# Altium PCB PCB1.PcbDoc
Units mm, origin at the board's own origin, x right, y up, seen from the top; angles counter-clockwise.
Board outline 150 x 150 mm, 2 copper layers (Top Layer, Bottom Layer); 47 components, 43 nets, 165 pads, 0 vias.
Unrouted connection lines stored in the file: 120.
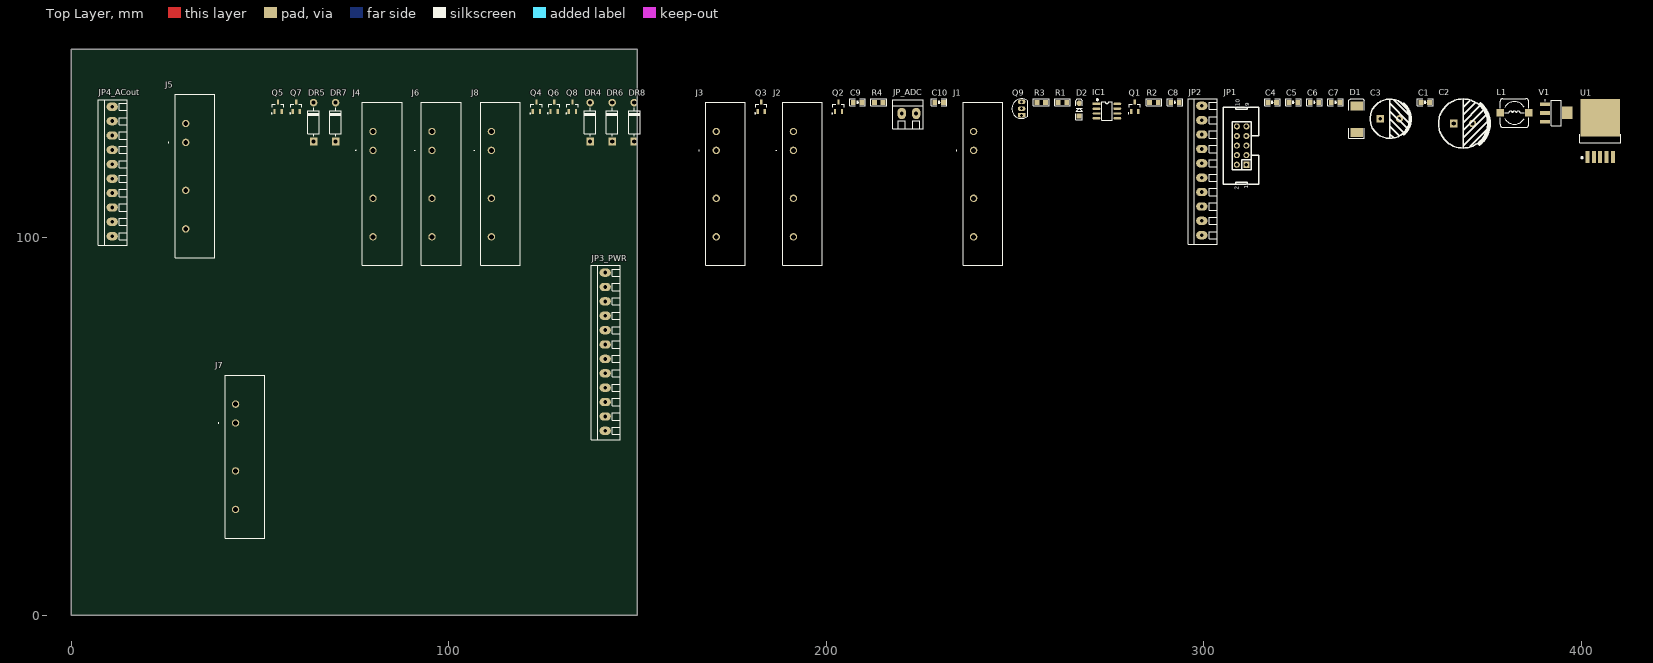
[diagram p0: Top Layer view]
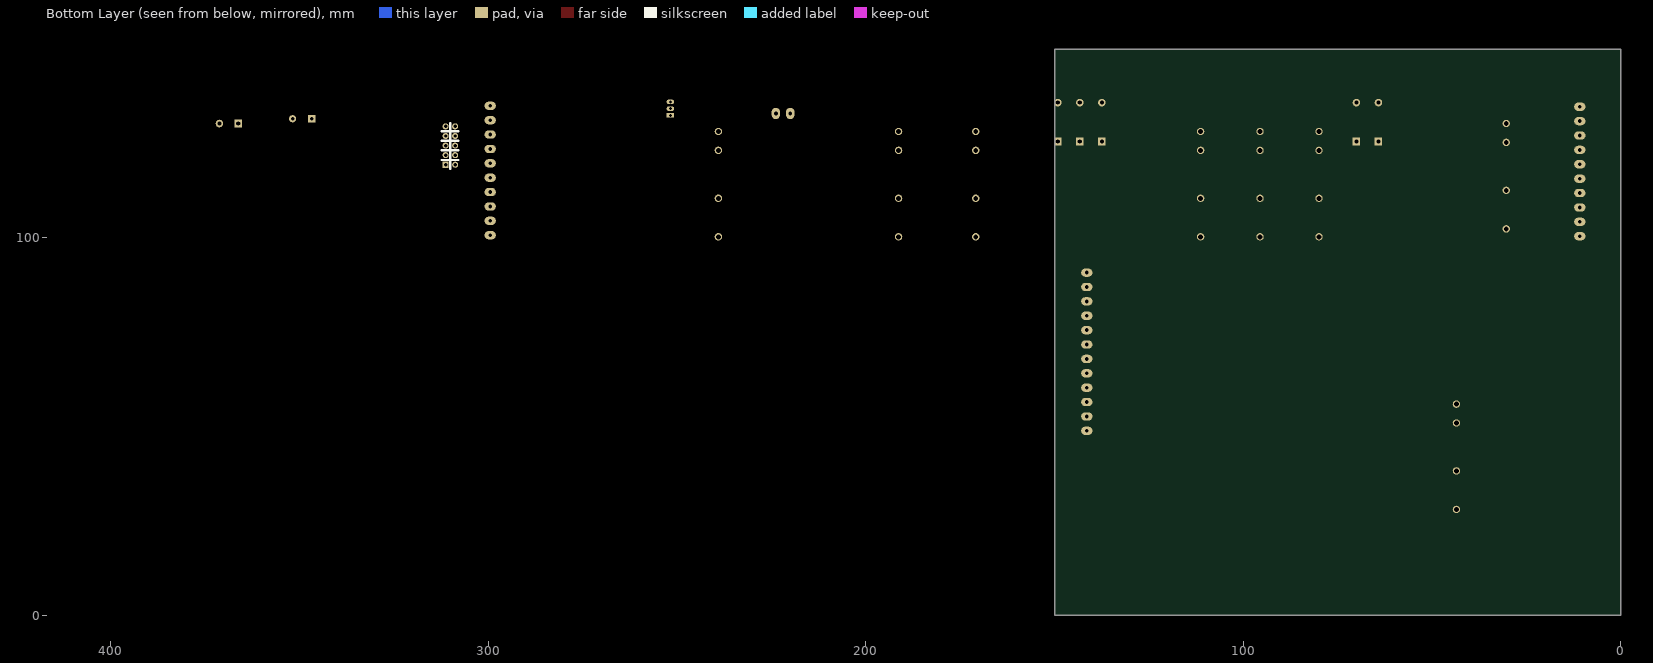
[diagram p1: Bottom Layer view, seen from below]

## Layer stack, top to bottom
Top Solder: solder mask 0.0102, Solder Resist, Dk 3.5
Top Layer: signal copper 0.0356
Dielectric 1: dielectric 0.32, FR-4, Dk 4.8
Bottom Layer: signal copper 0.0356
Bottom Solder: solder mask 0.0102, Solder Resist, Dk 3.5

## Board outline
0,0 0,150 150,150 150,0

## Design rules (kind name [scope] priority, off if disabled: settings)
Clearance [All] p1: gap=0.254 ignorepadtopadclearanceinfootprint=FALSE except(0: Arc-Hole Track-Hole SMDPad-Hole THPad-Hole Via-Hole Fill-Hole Poly-Hole Region-Hole Text-Hole)
PolygonConnect [All] p1: connectstyle=Relief reliefconductorwidth=0.254 reliefentries=4 polygonreliefangle="90 Angle" airgapwidth=0.254
RoutingVias [All] p1: holewidth=0.711 width=1.27 viastyle="Through Hole" minholewidth=0.711 minwidth=1.27 maxholewidth=0.711 maxwidth=1.27
SolderMaskExpansion [All] p1: expansion=0.102 istentingtop=FALSE
Width [All] p1: maxlimit=0.254 minlimit=0.254 preferedwidth=0.254
30 further rules are at their usual default settings.

## Components (designator, comment, footprint, x,y, rotation, side; value= is the part's Value field where it differs from the comment)
C1 "0.1uF" "C 0805_M" 358.724,135.89 r0 top
C2 "680uf" "CAP 5.0*12.5*20" 368.757,130.302 r0 top
C3 "220uF" "CAP 5.0*10*16" 349.326,131.572 r0 top
C4 "0.1uF" "C 0805_M" 318.211,135.89 r0 top
C5 "10uF" "C 0805_M" 323.799,135.89 r0 top
C6 "10uF" "C 0805_M" 329.387,135.89 r0 top
C7 "0.1uF" "C 0805_M" 334.975,135.89 r0 top
C8 "0.1uF" "C 0805_M" 292.43,135.89 r0 top
C9 "1nF" "C 0805_M" 208.356,135.89 r0 top
C10 "0.1uF" "C 0805_M" 229.946,135.89 r0 top
D1 "SS54" SMC 340.563,131.445 r90 top
D2 "Diode 1N4148" SOD-123 267.03,133.985 r90 top
DR4 "1.5KE300CA" DO-15 137.49,130.683 r90 top
DR5 "1.5KE300CA" DO-15 64.211,130.683 r90 top
DR6 "1.5KE300CA" DO-15 143.332,130.683 r90 top
DR7 "1.5KE300CA" DO-15 70.053,130.683 r90 top
DR8 "1.5KE300CA" DO-15 149.174,130.683 r90 top
IC1 "ACS712" SOP8_M 274.396,133.604 r0 top
J1 "Relay_in1" 2982647 239.09,123.19 r90 top
J2 "Relay_in1" 2982647 191.338,123.19 r90 top
J3 "Relay_in1" 2982647 170.891,123.19 r90 top
J4 "Relay_out" 2982647 79.959,123.19 r90 top
J5 "Relay_out" 2982647 30.353,125.302 r90 top
J6 "Relay_out" 2982647 95.58,123.19 r90 top
J7 "Relay_out" 2982647 43.561,50.967 r90 top
J8 "Relay_out" 2982647 111.328,123.19 r90 top
JP1 "Header 5X2" IDC2.54-LI-2x5P 311.353,119.38 r90 top
JP2 "HDR-1X10" KF128-3.81-10P 299.542,117.856 r90 top
JP3_PWR "HDR-1X12" KF128-3.81-12P 141.478,69.85 r90 top
JP4_ACout "HDR-1X10" KF128-3.81-10P 10.871,117.602 r90 top
JP_ADC "HDR-1X2" KF128-3.81-2P 221.945,132.969 r0 top
L1 "33uH" CDRH74 382.346,133.096 r0 top
Q1 "SI2304" SOT23-3M 281.762,133.477 r0 top
Q2 "SI2304" SOT23-3M 203.276,133.477 r0 top
Q3 "SI2304" SOT23-3M 182.829,133.477 r0 top
Q4 "SI2304" SOT23-3M 123.266,133.477 r0 top
Q5 "SI2304" SOT23-3M 54.813,133.477 r0 top
Q6 "SI2304" SOT23-3M 127.965,133.477 r0 top
Q7 "SI2304" SOT23-3M 59.639,133.477 r0 top
Q8 "SI2304" SOT23-3M 132.791,133.477 r0 top
Q9 "SS8050" TO92A 251.79,134.239 r0 top
R1 "1K" "R 0805_M" 262.585,135.89 r0 top
R2 "2K" "R 0805_M" 286.842,135.89 r0 top
R3 "2K" "R 0805_M" 256.997,135.89 r0 top
R4 "10K" "R 0805_M" 213.944,135.89 r0 top
U1 "LM2596S-5.0/NOPB" TO263-5A 405.079,121.412 r0 top
V1 "AMS1117-3V3" SOT223_M 393.395,133.096 r0 top

## Footprints (in the part's own frame and the unit in brackets; to place one, negate y for a bottom-side part, rotate by r counter-clockwise, add the part's x,y. Pads: shape width x height; smd on the part's side, far side on the other; paste and mask are expansions set on the pad)
2982647 [mm]
  round 1.95 hole 1.3: 1(-22.9,0) 2(-12.7,0) 3(0,0) 4(5,0)
  silkscreen extent -30.5,-7.7 12.7,4.6, body extent -30.5,-7.7 12.7,2.8, height 25.5
"C 0805_M" [mil] "无极性贴片电容"
  rect 50x50 smd: 1(-45,0) 2(45,0)
  silkscreen extent -81,-36 81,36, body extent -39,-24 39,24, height 20
"CAP 5.0*10*16" [mm] "脚距5mm直径10mm高度16mm"
  rect 1.9x1.9 hole 0.9: 1(-2.54,0)
  round 1.9 hole 0.9: 2(2.54,0)
  silkscreen extent -5.19,-5.21 5.5,5.19, body extent -5,-5 5.01,5, height 16.04
"CAP 5.0*12.5*20" [mm] "脚距5mm直径12.5mm高度20mm"
  rect 2x2 hole 1.1: 1(-2.5,0)
  round 2 hole 1.1: 2(2.5,0)
  silkscreen extent -6.5,-6.5 6.99,6.5, body extent -6.25,-6.25 6.26,6.25, height 20.03
CDRH74 [mm] "7.3*7.3*4.5mm（长宽高）"
  rect 2x2 smd: 1(-3.81,0) 2(3.81,0)
  silkscreen extent -3.81,-3.81 3.81,3.81, body extent -3.65,-3.65 3.65,3.65, height 4.5
DO-15 [mm] "3.3*10.3mm(直径，脚距）"
  rect 2x2 hole 1.1: 1(-5.15,0)
  round 2 hole 1.1: 2(5.15,0)
  silkscreen extent -3.81,-1.52 3.81,1.52, body extent -5.55,-1.65 5.55,1.65, height 3.35
IDC2.54-LI-2x5P [mm] "10P简易牛角座"
  rect 1.6x1.6 hole 0.9: 1(0,0)
  round 1.6 hole 0.9: 2(0,2.54) 3(2.54,0) 4(2.54,2.54) 5(5.08,0) 6(5.08,2.54) 7(7.62,0) 8(7.62,2.54) 9(10.16,0) 10(10.16,2.54)
  silkscreen extent -5.11,-3.23 15.27,6.1, body extent -5.08,-3.08 15.24,5.77, height 9.17
KF128-3.81-2P [mm] "螺钉式接线端子，脚距3.81mm"
  oval 2.2x3 hole 1: 1(-1.905,0) 2(1.905,0)
  silkscreen extent -4.32,-4.04 3.81,3.63, body extent -4.31,-3.9 3.81,3.5, height 8.55
KF128-3.81-10P [mm] "螺钉式接线端子，脚距3.81mm"
  oval 2.2x3 hole 1: 1(-17.145,0) 2(-13.335,0) 3(-9.525,0) 4(-5.715,0) 5(-1.905,0) 6(1.905,0) 7(5.715,0) 8(9.525,0) 9(13.335,0) 10(17.145,0)
  silkscreen extent -19.56,-4.04 19.05,3.63, body extent -19.55,-3.9 19.05,3.5, height 8.55
KF128-3.81-12P [mm] "螺钉式接线端子，脚距3.81mm"
  oval 2.2x3 hole 1: 1(-20.955,0) 2(-17.145,0) 3(-13.335,0) 4(-9.525,0) 5(-5.715,0) 6(-1.905,0) 7(1.905,0) 8(5.715,0) 9(9.525,0) 10(13.335,0) 11(17.145,0) 12(20.955,0)
  silkscreen extent -23.37,-4.04 22.86,3.63, body extent -23.36,-3.9 22.86,3.5, height 8.55
"R 0805_M" [mil] "1/8W贴片电阻"
  rect 50x50 smd: 1(-45,0) 2(45,0)
  silkscreen extent -81,-36 81,36, body extent -39,-25 39,25, height 20
SMC [mm] "DO-214-AB/SMC; 2 C-Bend Leads; Body 7.9 x 5.9 mm, inc. leads (LxW)"
  rect 2.4x3.3 smd: 1(-3.475,0) 2(3.475,0)
  silkscreen extent -5.07,-2.05 5.43,2.05
SOD-123 [mil] "2.7x1.6X1.1mm（长宽高，不包括引脚）"
  rect 55x50 smd: 1(-67.5,0)
  oct 55x50 smd: 2(67.5,0)
  silkscreen extent -108,-35 112,35, body extent -73,-31 73,31, height 48
SOP8_M [mm] "5*6*1.8mm（长宽高）"
  rect 2.1x0.6 smd: 1(-2.75,1.905)
  oval 2.1x0.6 smd: 2(-2.75,0.635) 3(-2.75,-0.635) 4(-2.75,-1.905) 5(2.75,-1.905) 6(2.75,-0.635) 7(2.75,0.635) 8(2.75,1.905)
  silkscreen extent -2.69,-2.5 1.4,3.15, body extent -3,-2.5 3,2.5, height 1.9
SOT23-3M [mm] "3x1.3x1mm(长宽高)"
  rect 0.6x1.4 smd: 1(-0.95,0) 2(0.95,0) 3(0,2.514)
  silkscreen extent -1.78,-0.63 1.5,1.97, body extent -1.5,0.07 1.5,2.47, height 1.05
SOT223_M [mm] "SOT223, 4-Leads, Body 6.5x3.5mm, Pitch 2.3mm, Lead Span 7mm, IPC Low Density"
  rect 2.7x1 smd: 1(-2.95,2.3) 2(-2.95,0) 3(-2.95,-2.3)
  rect 2.7x3.3 smd: 4(2.95,0)
  silkscreen extent -3.07,-3.35 1.3,3.47, body extent -1.85,-3.35 1.85,3.35, height 1.7
TO92A [mm] "92晶体管"
  rect 2x1.2 hole 0.8: 1(0,-1.8)
  oval 2x1.2 hole 0.8: 2(0,0) 3(0,1.8)
  silkscreen extent -2.6,-2.6 1.6,2.6, body extent -2.3,-2.3 1.3,2.3, height 7.6
TO263-5A [mm] "263，5脚晶体管"
  rect 1.05x3.2 smd: 1(-3.4,0) 2(-1.7,0) 3(0,0) 4(1.7,0) 5(3.4,0)
  rect 10.45x10 smd: 3(0,10.414)
  silkscreen extent -5.46,-0.33 5.46,6.04, body extent -5,-0.01 5,13.32, height 4.5

## Part data
C1 C4 C5 C6 C7: library part CAP-SMT
C2 C3: library part CAP-SMD, "CAP-SMD", Supplier 1="Arrow Electronics"
C8 C9 C10: library part Cap, "Capacitor", LatestRevisionDate=17-Jul-2002, LatestRevisionNote="Re-released for DXP Platform.", PackageDescription="Radial Cap, Thru-Hole; 2 Leads; 0.3 in Pin Spacing", PackageReference=RAD-0.3, Published=8-Jun-2000, Publisher="Altium Limited"
D1: library part DIO
D2: "High Conductance Fast Diode", Code_JEDEC=DO-204-AH, ComponentLink1Description="Manufacturer Link", ComponentLink1URL=http://www.fairchildsemi.com/, ComponentLink2Description=Datasheet, ComponentLink2URL=http://www.fairchildsemi.com/ds/1N%2F1N4148.pdf, DatasheetVersion=1997, LatestRevisionDate=17-Jul-2002, LatestRevisionNote="Re-released for DXP Platform.", PackageDescription="Diode, Axial; Body 3.8 x 1.9 mm (LxDia. max), Lead Dia. 0.53 mm (max)", PackageReference=DO-35, Published=8-Jun-2000, Publisher="Altium Limited"
DR4 DR5 DR6 DR7 DR8: library part DR, "瞬态电压抑制二极管", BOM名称=瞬态电压抑制二极管, 学习资源=www.ooocke.com, 版权归属=源创客
IC1: "电流检测芯片", BOM名称=电流检测芯片, 学习资源=www.ooocke.com, 版权归属=源创客
J1 J2 J3 J4 J5 J6 J7 J8: library part 2982647, "Connector", Manufacturer_Name="Phoenix Contact", Mouser Part Number=651-2982647, Arrow Part Number=2982647, Arrow Price/Stock=https://www.arrow.com/en/products/2982647/phoenix-contact, Datasheet Link=https://componentsearchengine.com/Datasheets/1/2982647.pdf, Height=25.4mm, Manufacturer_Part_Number=2982647, Mouser Price/Stock=https://www.mouser.co.uk/ProductDetail/Phoenix-Contact/2982647?qs=Mj9TL1%2FHg907%2FKjSTtcRdw%3D%3D
JP1: "5*2P接插件", BOM名称=5*2P接插件, 学习资源=www.ooocke.com, 版权归属=源创客
JP2 JP4_ACout: library part "Header 10", "10P接插件", BOM名称=10P接插件, 学习资源=www.ooocke.com, 版权归属=源创客
JP3_PWR: library part "Header 12", "12P接插件", BOM名称=12P接插件, 学习资源=www.ooocke.com, 版权归属=源创客
JP_ADC: library part "Header 2", "2P接插件", BOM名称=2P接插件, 学习资源=www.ooocke.com, 版权归属=源创客
L1: library part L-CDRH74
Q1 Q2 Q3 Q4 Q5 Q6 Q7 Q8: library part SI2302, "N沟道场效应管", BOM名称=N沟道场效应管, 学习资源=www.ooocke.com, 版权归属=源创客
Q9: library part 8050-DIP, "高频放大-NPN型", BOM名称=高频放大-NPN型, 学习资源=www.ooocke.com, 属性="40V 1.5A 1W 100MHZ", 版权归属=源创客
R1 R2 R3 R4: library part Res1, "Resistor", LatestRevisionDate=17-Jul-2002, LatestRevisionNote="Re-released for DXP Platform.", PackageDescription="Axial Device, Thru-Hole; 2 Leads; 0.3 in Pin Spacing", PackageReference=AXIAL-0.3, Published=8-Jun-2000, Publisher="Altium Limited"
U1: library part LM2596S-5.0, "SIMPLE SWITCHER® Power Converter 150 KHz 3A Step-Down Voltage Regulator, 5-pin TO-263, Pb-Free", Manufacturer="Texas Instruments", PackageTopMarking="NSUZXYTTE#*LM2596S*-5.0 P+", PowerWise=N, Code_JEDEC=MO-169-AB, ComponentLink1Description="Datasheet URL", ComponentLink1URL=http://www.ti.com/general/docs/lit/getliterature.tsp?genericPartNumber=LM2596&fileType=pdf, CompType=Switcher, PackageDescription="TO-263, Molded, .400 x .390 x .180in, 5 Lead, .067in Pitch, Surface Mount", PackageReference=KTT0005B, PinCount=5, RoHS=Y
V1: library part AMS1117, "三端稳压芯片", BOM名称=稳压芯片, 学习资源=www.ooocke.com, 版权归属=源创客

## Nets (pads, with @x,y where several pads share a name; then routed paths per layer and width w, separated by ;. In a path a pad name is that pad's centre, name@x,y a point inside that pad or via, vN(x,y) a via of type N, cw(c..) or ccw(c..) an arc to the next point about the centre after c; other vN are vias at no path point)
3.3V: C6.2 C7.2 J1.2 J2.2 J3.2 JP3_PWR.4 Q1.3 Q2.3 Q3.3 V1.2
5V: C3.2 C4.2 C5.2 C8.2 IC1.8 JP3_PWR.10 L1.2 R2.2 U1.4 V1.3
24V: C1.2 C2.2 JP3_PWR.12 Q4.3 Q5.3 Q6.3 Q7.3 Q8.3 U1.1
24V_in1: J1.3 JP3_PWR.1
24V_in2: J2.3 JP3_PWR.2
24V_in3: J3.3 JP3_PWR.3
AC_out1: DR4.1 J4.2 JP4_ACout.1
AC_out1x: DR4.2 J4.1 JP4_ACout.2
AC_out2: DR5.1 J5.2 JP4_ACout.3
AC_out2x: DR5.2 J5.1 JP4_ACout.4
AC_out3: DR6.1 J6.2 JP4_ACout.5
AC_out3x: DR6.2 J6.1 JP4_ACout.6
AC_out4: DR7.1 J7.2 JP4_ACout.7
AC_out4x: DR7.2 J7.1 JP4_ACout.8
AC_out5: DR8.1 J8.2 JP4_ACout.9
AC_out5x: DR8.2 J8.1 JP4_ACout.10
GND: C1.1 C2.1 C3.1 C4.1 C5.1 C6.1 C7.1 C8.1 C9.1 C10.1 D1.1 IC1.5 J1.4 J2.4 J3.4 J4.4 J5.4 J6.4 J7.4 J8.4 JP3_PWR.7 JP3_PWR.9 JP3_PWR.11 Q9.1 R4.1 U1.3 U1.5 V1.1
GPIO_adc8: C10.2 D2.2 JP1.9 JP2.9
GPIO_in1: JP1.1 JP2.1 Q1.2
GPIO_in2: JP1.2 JP2.2 Q2.2
GPIO_in3: JP1.3 JP2.3 Q3.2
GPIO_ot4: JP1.4 JP2.4 Q4.1
GPIO_ot5: JP1.5 JP2.5 Q5.1
GPIO_ot6: JP1.6 JP2.6 Q6.1
GPIO_ot7: JP1.7 JP2.7 Q7.1
GPIO_ot8: JP1.8 JP2.8 Q8.1
NetC9_2: C9.2 IC1.6
NetD1_2: D1.2 L1.1 U1.2
NetD2_1: D2.1 R3.2 R4.2
NetIC1_1: IC1.1 IC1.2 JP_ADC.2
NetIC1_3: IC1.3 IC1.4 JP_ADC.1
NetIC1_7: IC1.7 R3.1
NetJ1_1: J1.1 Q1.1
NetJ2_1: J2.1 Q2.1
NetJ3_1: J3.1 Q3.1
NetJ4_3: J4.3 Q4.2
NetJ5_3: J5.3 Q5.2
NetJ6_3: J6.3 Q6.2
NetJ7_3: J7.3 Q7.2
NetJ8_3: J8.3 Q8.2
NetQ9_2: Q9.2 R1.2
pwm_speed: JP1.10 JP2.10 JP3_PWR.6 R1.1
pwm_speed_5V: JP3_PWR.5 Q9.3 R2.1
pads on no net: JP3_PWR.8 V1.4

## Silkscreen, mask and mechanical layers (free items; w line width, h text height)
Mechanical 1:
  lines w0.254: 1,1 149,1 149,149 1,149 1,1

## Text inside footprints (layer, text, board x,y; h text height)
JP1: Top Overlay "2" at 309.321,112.776 h1.02 r90; Top Overlay "1" at 311.861,113.03 h1.02 r90; Top Overlay "9" at 312.064,134.925 h1.02 r90; Top Overlay "10" at 309.524,134.925 h1.02 r90